# Altium PCB FIT_PM_Dual_Range_AFE.PcbDoc (part 4 of 17)
Units mm, origin at the board's own origin, x right, y up, seen from the top; angles counter-clockwise.
Board outline 259 x 114 mm, 8 copper layers (Top Layer, Mid-Layer 1, Mid-Layer 2, Layer 1, Layer 2, Mid-Layer 3, Mid-Layer 4, Bottom Layer), stack 1.616 mm thick; 963 components, 806 nets, 4757 pads, 2208 vias.
Unrouted connection lines stored in the file: 682.
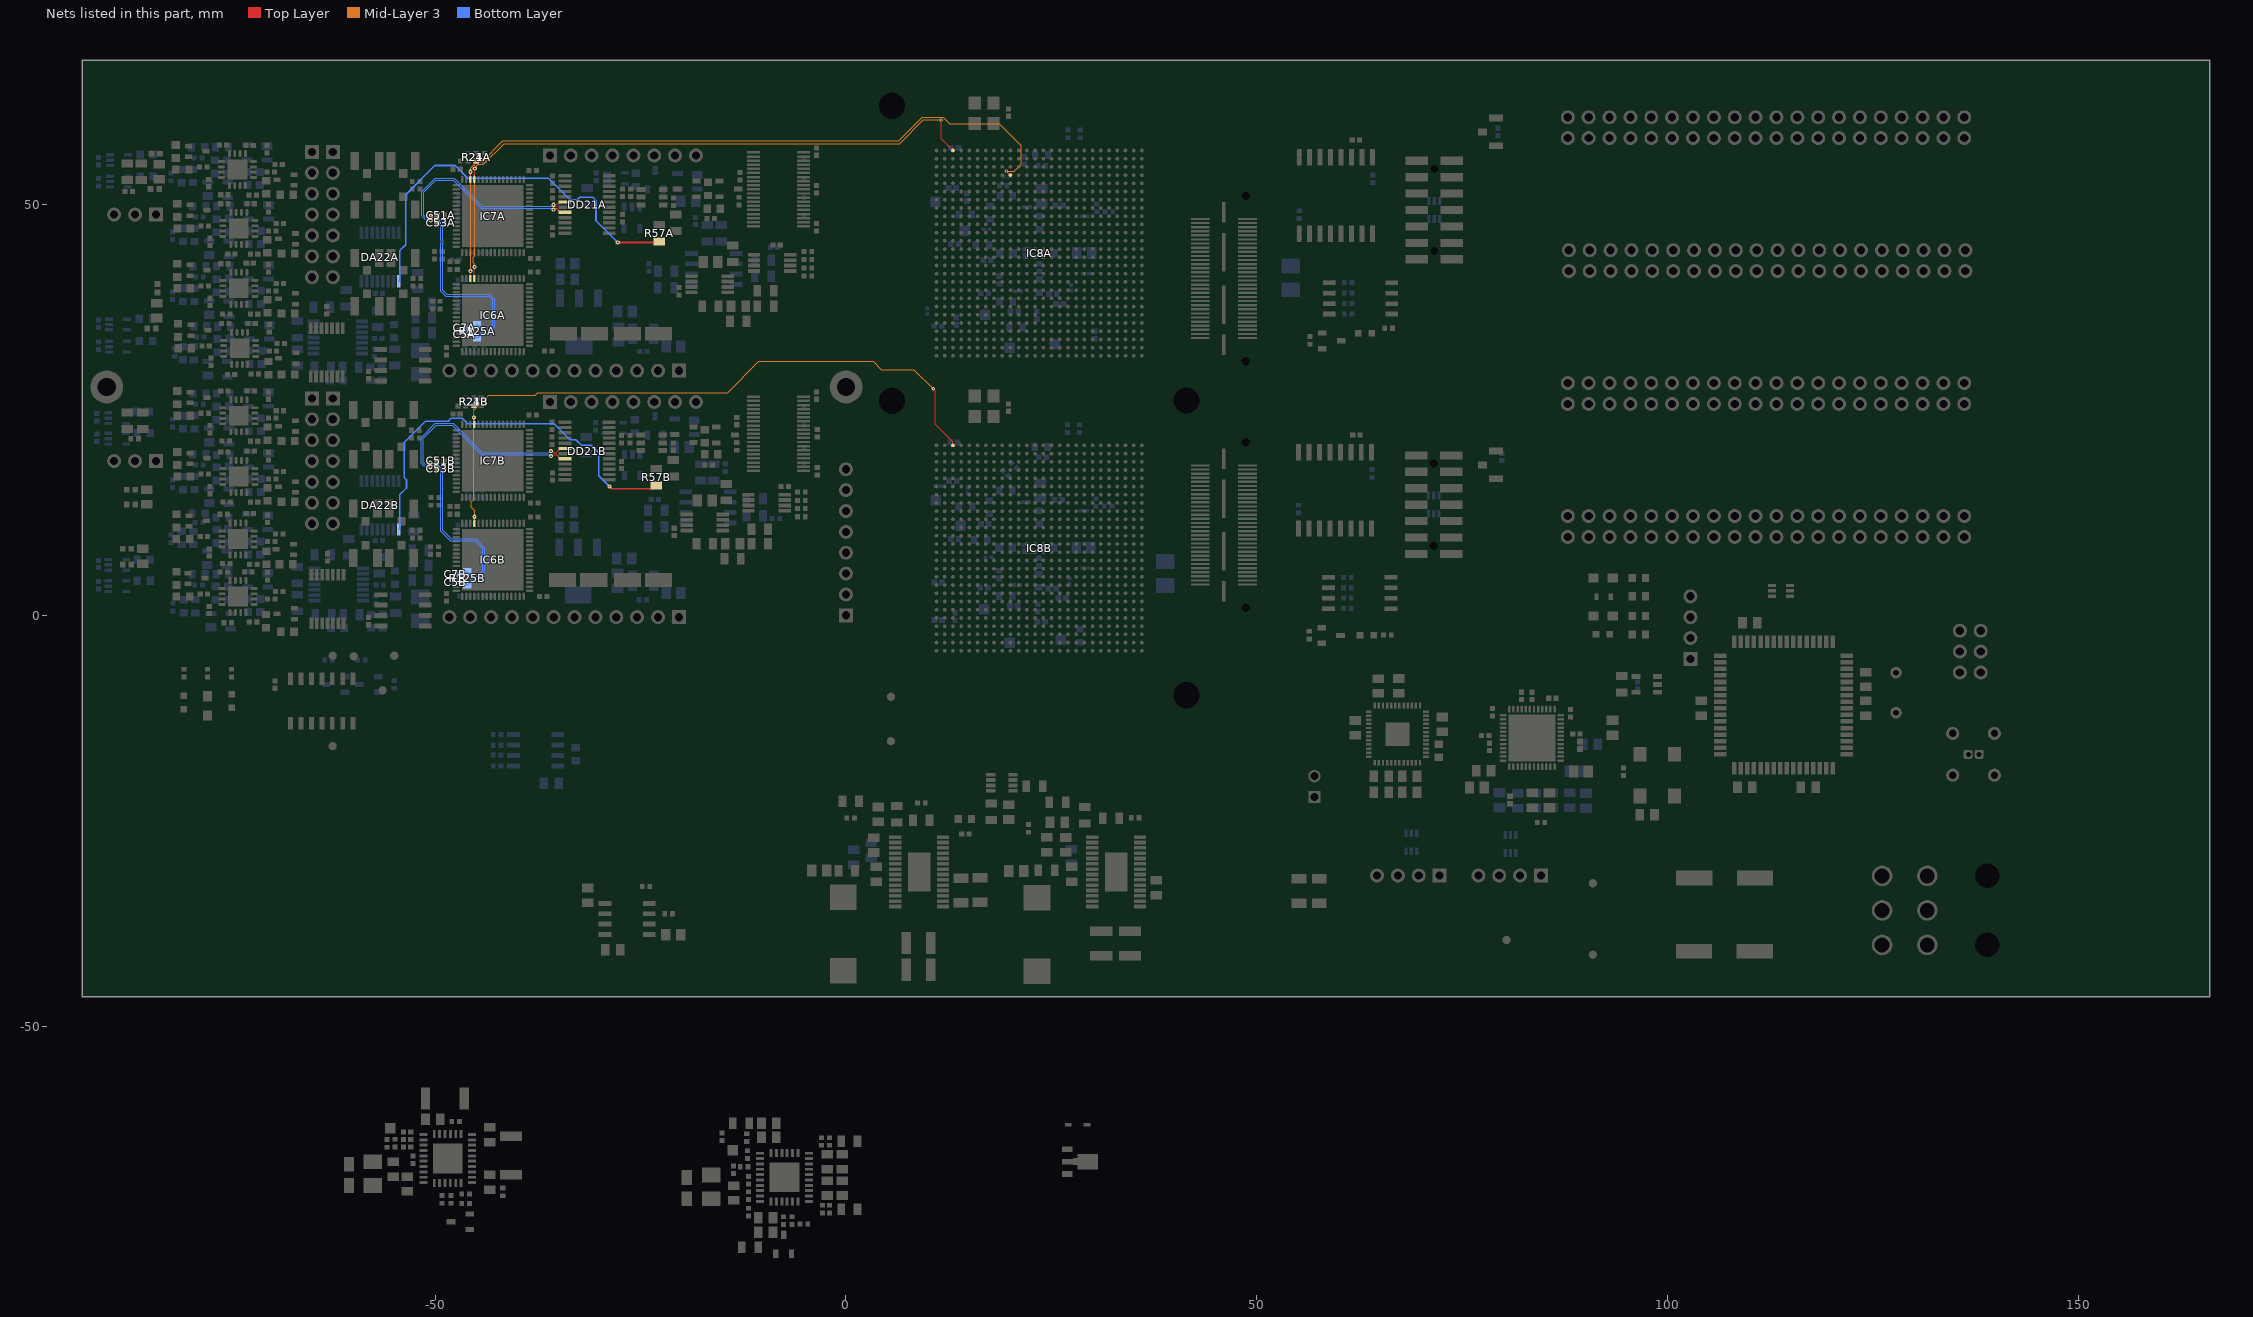
[diagram p8: the nets of this part, all layers, seen from the top]

## Footprints (in the part's own frame and the unit in brackets; to place one, negate y for a bottom-side part, rotate by r counter-clockwise, add the part's x,y. Pads: shape width x height; smd on the part's side, far side on the other; paste and mask are expansions set on the pad) (continued)
SAMTEC_QSH-030-01-L-D-A [mm] "60 (2x30) Contacts, Pitch 0.5mm, Straight Double Row High Speed Ground Plane Socket"
  rect 0.279x2.27 smd mask+0: 1(-7.25,-2.865) 2(-7.25,2.865) 3(-6.75,-2.865) 4(-6.75,2.865) 5(-6.25,-2.865) 6(-6.25,2.865) 7(-5.75,-2.865) 8(-5.75,2.865) 9(-5.25,-2.865) 10(-5.25,2.865) 11(-4.75,-2.865) 12(-4.75,2.865) 13(-4.25,-2.865) 14(-4.25,2.865) 15(-3.75,-2.865) 16(-3.75,2.865) 17(-3.25,-2.865) 18(-3.25,2.865) 19(-2.75,-2.865) 20(-2.75,2.865) 21(-2.25,-2.865) 22(-2.25,2.865) 23(-1.75,-2.865) 24(-1.75,2.865) 25(-1.25,-2.865) 26(-1.25,2.865) 27(-0.75,-2.865) 28(-0.75,2.865) 29(-0.25,-2.865) 30(-0.25,2.865) 31(0.25,-2.865) 32(0.25,2.865) 33(0.75,-2.865) 34(0.75,2.865) 35(1.25,-2.865) 36(1.25,2.865) 37(1.75,-2.865) 38(1.75,2.865) 39(2.25,-2.865) 40(2.25,2.865) 41(2.75,-2.865) 42(2.75,2.865) 43(3.25,-2.865) 44(3.25,2.865) 45(3.75,-2.865) 46(3.75,2.865) 47(4.25,-2.865) 48(4.25,2.865) 49(4.75,-2.865) 50(4.75,2.865) 51(5.25,-2.865) 52(5.25,2.865) 53(5.75,-2.865) 54(5.75,2.865) 55(6.25,-2.865) 56(6.25,2.865) 57(6.75,-2.865) 58(6.75,2.865) 59(7.25,-2.865) 60(7.25,2.865)
  rect 2.54x0.43 smd mask+0: 61(-8.065,0) 64(8.065,0)
  rect 4.7x0.43 smd mask+0: 62(-3.175,0) 63(3.175,0)
  round 0.5 hole 1 unplated mask+0.25: 65(-10.066,2.67) 66(10.066,2.67)
  silkscreen extent -10.67,-4.39 10.64,3.62, body extent -10.67,-3.87 10.64,3.62, height 3.25
SAMTEC_TSW-104-07-L-S-LL [mm] "4 Contacts - Pitch 2.54mm - Single Row  Through Mount Straigh Header (Post Lead 5.84mm, Tail Lead 2.54mm, Insulator 2.54mm)"
  rect 1.7x1.7 hole 1: 1(0,0)
  round 1.7 hole 1: 2(2.54,0) 3(5.08,0) 4(7.62,0)
  silkscreen extent -1.27,-1.27 8.89,1.93, body extent -1.27,-1.27 8.89,1.27, height 8.38
SODFL2512X100N [mm] "SODFL Diode; 1.70mm W X 1.25mm L X 1.00mm H body, IPC Medium Density"
  rect 0.84x0.46 smd: 1(-1.14,0) 2(1.14,0)
  silkscreen extent -1.47,-0.65 0.85,0.85, body extent -1.35,-0.65 1.35,0.65, height 1
SOIC127P600X175-8N [mm] "SOIC 8, Pitch 1.27mm - Body 4x5mm, IPC Medium Density"
  rect 1.55x0.6 smd: 1(-2.7,1.905) 2(-2.7,0.635) 3(-2.7,-0.635) 4(-2.7,-1.905) 5(2.7,-1.905) 6(2.7,-0.635) 7(2.7,0.635) 8(2.7,1.905)
  silkscreen extent -2.52,-2.5 1.55,2.88, body extent -3.1,-2.5 3.1,2.5, height 1.75
SOIC127P600X175-14N [mm] "SOIC 14, Pitch 1.27mm - Body 4x8.75mm, IPC Medium Density"
  rect 1.55x0.6 smd: 1(-2.7,3.81) 2(-2.7,2.54) 3(-2.7,1.27) 4(-2.7,0) 5(-2.7,-1.27) 6(-2.7,-2.54) 7(-2.7,-3.81) 8(2.7,-3.81) 9(2.7,-2.54) 10(2.7,-1.27) 11(2.7,0) 12(2.7,1.27) 13(2.7,2.54) 14(2.7,3.81)
  silkscreen extent -2.52,-4.4 1.55,4.78, body extent -3.1,-4.37 3.1,4.38, height 1.75
SOIC127P1030X265-16N [mm] "SOIC, 1.27mm Pitch; 16 Pin, 7.50mm W X 10.3mm L X 2.65mm H body, IPC Medium Density"
  rect 2x0.6 smd: 1(-4.65,4.445) 2(-4.65,3.175) 3(-4.65,1.905) 4(-4.65,0.635) 5(-4.65,-0.635) 6(-4.65,-1.905) 7(-4.65,-3.175) 8(-4.65,-4.445) 9(4.65,-4.445) 10(4.65,-3.175) 11(4.65,-1.905) 12(4.65,-0.635) 13(4.65,0.635) 14(4.65,1.905) 15(4.65,3.175) 16(4.65,4.445)
  silkscreen extent -5.52,-5.15 3.32,5.38, body extent -5.18,-5.25 5.18,5.25, height 1.68
SOP63P600X175-24N [mm] "SOP, 0.635mm Pitch; 24 Pin, 3.90mm W X 8.65mm L X 1.75mm H Body, IPC Medium Density"
  rect 1.55x0.4 smd: 1(-2.7,3.492) 2(-2.7,2.857) 3(-2.7,2.222) 4(-2.7,1.587) 5(-2.7,0.952) 6(-2.7,0.317) 7(-2.7,-0.318) 8(-2.7,-0.953) 9(-2.7,-1.588) 10(-2.7,-2.223) 11(-2.7,-2.858) 12(-2.7,-3.492) 13(2.7,-3.492) 14(2.7,-2.857) 15(2.7,-2.222) 16(2.7,-1.587) 17(2.7,-0.952) 18(2.7,-0.317) 19(2.7,0.318) 20(2.7,0.953) 21(2.7,1.588) 22(2.7,2.223) 23(2.7,2.858) 24(2.7,3.492)
  silkscreen extent -3.33,-4.35 1.6,4.35, body extent -3.13,-4.37 3.13,4.37, height 1.75
SOP65P490X110-8N [mm] "SOP, 0.65mm pitch; 8 pin, 3.00mm W X 3.00mm L X 1.10mm H body, IPC Medium Density"
  rect 1.5x0.45 smd: 1(-2.2,0.975) 2(-2.2,0.325) 3(-2.2,-0.325) 4(-2.2,-0.975) 5(2.2,-0.975) 6(2.2,-0.325) 7(2.2,0.325) 8(2.2,0.975)
  silkscreen extent -2.83,-1.5 1.12,1.82, body extent -2.45,-1.55 2.45,1.55, height 1.1
SOP65P640X110-16N [mm] "SOP, 0.65mm pitch; 16 pin, 4.40mm W X 5.00mm L X 1.10mm H body IPC Medium Density"
  rect 1.5x0.45 smd: 1(-2.95,2.275) 2(-2.95,1.625) 3(-2.95,0.975) 4(-2.95,0.325) 5(-2.95,-0.325) 6(-2.95,-0.975) 7(-2.95,-1.625) 8(-2.95,-2.275) 9(2.95,-2.275) 10(2.95,-1.625) 11(2.95,-0.975) 12(2.95,-0.325) 13(2.95,0.325) 14(2.95,0.975) 15(2.95,1.625) 16(2.95,2.275)
  silkscreen extent -3.57,-2.5 1.88,3.13, body extent -3.12,-2.55 3.12,2.55, height 1.1
SOP65P640X120-14N [mm] "SOP, 14-Leads, Body 5.1x4.5mm (max), Pitch 0.65mm, IPC Medium Density"
  rect 1.45x0.45 smd: 1(-2.95,1.95) 2(-2.95,1.3) 3(-2.95,0.65) 4(-2.95,0) 5(-2.95,-0.65) 6(-2.95,-1.3) 7(-2.95,-1.95) 8(2.95,-1.95) 9(2.95,-1.3) 10(2.95,-0.65) 11(2.95,0) 12(2.95,0.65) 13(2.95,1.3) 14(2.95,1.95)
  silkscreen extent -3.08,-2.55 1.85,2.85, body extent -3.12,-2.55 3.12,2.55, height 1.2
SOP65P640X120-29N-R274X475 [mm] "SOP, 0.65mm pitch; 28 pin, 4.50mm W X 9.70mm L (thermal tab 4.75 X 2.74mm), IPC Medium Density"
  rect 1.5x0.45 smd: 1(-2.9,4.225) 2(-2.9,3.575) 3(-2.9,2.925) 4(-2.9,2.275) 5(-2.9,1.625) 6(-2.9,0.975) 7(-2.9,0.325) 8(-2.9,-0.325) 9(-2.9,-0.975) 10(-2.9,-1.625) 11(-2.9,-2.275) 12(-2.9,-2.925) 13(-2.9,-3.575) 14(-2.9,-4.225) 15(2.9,-4.225) 16(2.9,-3.575) 17(2.9,-2.925) 18(2.9,-2.275) 19(2.9,-1.625) 20(2.9,-0.975) 21(2.9,-0.325) 22(2.9,0.325) 23(2.9,0.975) 24(2.9,1.625) 25(2.9,2.275) 26(2.9,2.925) 27(2.9,3.575) 28(2.9,4.225)
  rect 2.74x4.75 smd: 29(0,0)
  silkscreen extent -3.53,-4.85 1.8,5.07, body extent -3.22,-4.9 3.22,4.9, height 1.2
SOT65P210X110-3N [mm] "SOT323, 0.65mm pitch; 3 pin, 1.25mm W X 2.00mm L, IPC Medium Density"
  rect 0.85x0.55 smd: 1(-1.05,0.65) 2(-1.05,-0.65) 3(1.05,0)
  silkscreen extent -1.33,-1 0.3,1.57, body extent -1.1,-1.1 1.1,1.1, height 1.1
SOT65P210X110-5N [mm] "SOT353, SC70-5, SOT, 0.65mm Pitch, 5 Pin, 1.25mm W X 2.00mm L X 1.10mm H, IPC Medium Density"
  rect 0.95x0.4 smd: 1(-1.1,0.65) 2(-1.1,0) 3(-1.1,-0.65) 4(1.1,-0.65) 5(1.1,0.65)
  silkscreen extent -1.42,-1 0.3,1.47, body extent -1.2,-1.1 1.2,1.1, height 1.1
SOT65P210X110-6N [mm] "SOT363, SC70-6, SOT, 0.65mm Pitch, 6 Pin, 1.25mm W X 2.00mm L X 1.10mm H, IPC Medium Density"
  rect 0.95x0.4 smd: 1(-1.1,0.65) 2(-1.1,0) 3(-1.1,-0.65) 4(1.1,-0.65) 5(1.1,0) 6(1.1,0.65)
  silkscreen extent -1.42,-1 0.3,1.48, body extent -1.2,-1.1 1.2,1.1, height 1.1
SOT65P280X100-8N [mm] "SOT, 0.65mm pitch; 8 pin, 1.625mm W X 2.90mm L X 1.00mm H body, IPC Medium Density"
  rect 1.1x0.45 smd: 1(-1.35,0.975) 2(-1.35,0.325) 3(-1.35,-0.325) 4(-1.35,-0.975) 5(1.35,-0.975) 6(1.35,-0.325) 7(1.35,0.325) 8(1.35,0.975)
  silkscreen extent -1.77,-1.45 0.48,1.82, body extent -1.4,-1.5 1.4,1.5, height 1
SOT89 [mm] "SOT89-3, 3-Leads, Body 2.48x4.5mm"
  rect 1.25x0.7 smd: 1(-1.89,1.5) 3(-1.89,-1.5)
  rect 1.35x0.7 smd: 2(-1.84,0)
  rect 3x0.85 smd: 2(0.33,0)
  rect 2.475x0.525 smd: 2(0.592,-0.687) 2(0.592,0.687)
  Top Layer region: -1.165,0.425 -0.64,0.95 -0.64,-0.95 -1.165,-0.425
  silkscreen extent -2.22,-2.25 1.24,2.58, body extent -2.44,-2.25 1.81,2.25, height 1.6
SOT95P230X110-3N [mm] "SOT23, 3 pin, Pitch 0.95mm - 1.3mm W X 2.9mm L X 1.1mm H, IPC Medium Density"
  rect 1x0.6 smd: 1(-1.15,0.95) 2(-1.15,-0.95) 3(1.15,0)
  silkscreen extent -1.53,-1.45 0.33,1.87, body extent -1.08,-1.5 1.25,1.5, height 1.1
SOT95P240X110-3N [mm] "SOT23 3-Leads, Pitch 0.95mm, Body 1.3x2.9mm, IPC Medium Density"
  rect 1.05x0.65 smd: 1(-1.15,0.95) 2(-1.15,-0.95) 3(1.15,0)
  silkscreen extent -1.52,-1.45 0.3,1.92, body extent -1.25,-1.5 1.25,1.5, height 1.1
SOT95P240X130-3N [mm] "SOT23 3-Leads, Pitch 0.95mm - Body 1.3x2.9mm, IPC Medium Density"
  rect 1.05x0.65 smd: 1(-1.15,0.95) 2(-1.15,-0.95) 3(1.15,0)
  silkscreen extent -1.53,-1.45 0.3,1.92, body extent -1.25,-1.5 1.25,1.5, height 1.3
SOT95P280X145-5N [mm] "SOT, 0.95mm pitch; 5 pin, 1.60mm W X 2.90mm L X 1.45mm H body, IPC Medium Density"
  rect 1.1x0.6 smd: 1(-1.3,0.95) 2(-1.3,0) 3(-1.3,-0.95) 4(1.3,-0.95) 5(1.3,0.95)
  silkscreen extent -0.43,-1.45 0.43,1.45, body extent -1.4,-1.5 1.4,1.5, height 1.45
SOT95P280X145-6N [mm] "SOT23, 6-Leads, Body 1.6x3.0mm, Pitch 0.95mm, IPC Medium Density"
  rect 1.05x0.6 smd: 1(-1.35,0.95) 2(-1.35,0) 3(-1.35,-0.95) 4(1.35,-0.95) 5(1.35,0) 6(1.35,0.95)
  silkscreen extent -1.78,-1.55 0.45,1.92, body extent -1.4,-1.5 1.4,1.5, height 1.45
SOT95P285X140-5N [mm] "SOT23, 5-Leads, Body 3.00x2.85mm, Pitch 0.95mm, IPC Medium Density"
  rect 1.1x0.6 smd: 1(-1.3,0.95) 2(-1.3,0) 3(-1.3,-0.95) 4(1.3,-0.95) 5(1.3,0.95)
  silkscreen extent -0.43,-1.5 0.42,1.5, body extent -1.43,-1.5 1.43,1.5, height 1.4
SOT143N [mm] "SOT143, 4-Leads, Body 3.0x2.6mm (max), Pitch 1.92mm, IPC Medium Density"
  rect 1.3x1 smd: 1(-1.2,0.75)
  rect 1.3x0.6 smd: 2(-1.2,-0.95) 3(1.2,-0.95) 4(1.2,0.95)
  silkscreen extent -1.18,-1.5 0.7,1.93, body extent -1.25,-1.5 1.25,1.5, height 1.1
SOT230P700X180-4N [mm] "SOT223, 2.30mm pitch; 3 pin, 3.70mm W X 6.70mm L, IPC Medium Density"
  rect 2.15x0.95 smd: 1(-2.9,2.3) 2(-2.9,0) 3(-2.9,-2.3)
  rect 2.15x3.25 smd: 4(2.9,0)
  silkscreen extent -3.87,-3.35 1.45,3.47, body extent -3.65,-3.35 3.65,3.35, height 1.81
SW_TYCO_1571983-4 [mm] "Pitch 1.27mm,  Body 6.2x6.2mm, 4 Ways SPST Surface-Mount DIP Switch, TYCO GDH Serie"
  rect 1.55x0.55 smd: 1(-3.8,1.905) 2(-3.8,0.635) 3(-3.8,-0.635) 4(-3.8,-1.905) 5(3.8,-1.905) 6(3.8,-0.635) 7(3.8,0.635) 8(3.8,1.905)
  silkscreen extent -4.43,-3.1 2.7,3.1, body extent -4.06,-3.1 4.06,3.1, height 2.36
TPS127 [mm] "1.27 x  1.27mm SMD Test Point Area"
  rect 1.27x1.27 smd paste-1.27: 1(0,0)
  silkscreen extent -0.94,-0.94 0.94,0.94
XTAL_ABRACON_ABL [mm] "HC-49/U-S Leaded Cristal, Body 11.5x4.66mm; Pitch 4.88mm"
  round 1.4 hole 0.7: 1(-2.44,0) 2(2.44,0)
  silkscreen extent -5.75,-2.5 5.75,2.5, body extent -5.75,-2.5 5.75,2.5, height 3.5

## Part data
B2 B3 B4 B6 B11 B12 B17 B18 B19 B20: library part SMD_PAD_D1MM, "Pad", Author="CERN DEM JLC", Component Type="Standard (No BOM)", ComponentHeight=0mm, CreateDate=10.10.2017, Family="SMD Pad", HelpURL=Undefined, LatestRevisionDate=10.10.2017, Mounted=No, PackageDescription="1mm Diameter SMD Pad", Part Description="1mm Diameter SMD Pad", Part Number=SMD_PAD_D1MM, Pin Count=1, Sense=No, SMD=Yes, Socket=No, Status=None
C1A C1B: library part CC0805_2.7PF_250V_0.05PF_NP0, "Non-polarised capacitor", Case=0805, Manufacturer=GENERIC, Manufacturer1 ComponentHeight=1.30mm, Manufacturer1 Example=AVX, Manufacturer1 Part Number=600F2R7AT250XT, Tolerance=±0.05pF, Voltage=50V, Author="CERN DEM HF", Component Type=Standard, CreateDate=07.05.2024, HelpURL=\\cern.ch\dfs\Applications\Altium\Datasheets\CC0805_NP0_AVX(MLC).pdf, LatestRevisionDate=07.05.2024, Manufacturer Part Number=CC0805_2.7PF_250V_0.05PF_NP0, Mounted=Yes, Part Description="SMD Multilayer Chip Ceramic Capacitor", Part Number=CC0805_2.7PF_250V_0.05PF_NP0, Pin Count=2, Sense=No, SMD=Yes, Socket=No, Status=None, TC=C0G/NP0
C2: library part CAE830-1020_150UF_25V_20%, "Polarised capacitor", Case=F, Manufacturer=PANASONIC, Manufacturer Part Number=EEEFP1E151AP, Tolerance=±20%, Voltage=25V, Author="CERN DEM HF", Component Type=Standard, ComponentHeight=10.2mm, CreateDate=24.05.2024, HelpURL=\\cern.ch\dfs\Applications\Altium\Datasheets\CAE_PANASONIC_FP.pdf, LatestRevisionDate=24.05.2024, Mounted=Yes, Part Description="Aluminum Electrolytic SMT Capacitor", Part Number=CAE830-1020_150UF_25V_20%, Pin Count=2, Sense=No, SMD=Yes, Socket=No, Status="Not Recommended"
C3A C3B C5A C5B C7A C7B C8A C8B C9A C9B C10A C10B C16A C16B C17A C17B C18A C18B C50A C50B C51A C51B C53A C53B C55A C55B C56A C56B C58A C58B C59A C59B C60A C60B C61A C61B C78A C78B C234A C234B: library part CC0402_100NF_16V_10%_X5R, "Non-polarised capacitor", Case=0402, Manufacturer=GENERIC, Manufacturer1 ComponentHeight=0.55mm, Manufacturer1 Example=MURATA, Manufacturer1 Part Number=GRM155R61C104KA88D, Tolerance=±10%, Voltage=16V, Author="CERN DEM JLC", Component Type=Standard, CreateDate=10.12.2013, HelpURL=\\cern.ch\dfs\Applications\Altium\Datasheets\CC0402_X5R_MURATA_GRM.pdf, LatestRevisionDate=10.12.2013, Manufacturer Part Number=CC0402_100NF_16V_10%_X5R, Mounted=Yes, Part Description="SMD Multilayer Chip Ceramic Capacitor", Part Number=CC0402_100NF_16V_10%_X5R, Pin Count=2, Sense=No, SMD=Yes, Socket=No, Status=None, TC=X5R
C4 C118 C135 C137: library part CC1206_22UF_25V_20%_X5R, "Non-polarised capacitor", Case=1206, Manufacturer=GENERIC, Manufacturer1 ComponentHeight=1.8mm, Manufacturer1 Example=TDK, Manufacturer1 Part Number=C3216X5R1E226M160, Tolerance=±20%, Voltage=25V, Author="CERN DEM WB", Component Type=Standard, CreateDate=25.07.2018, HelpURL=\\cern.ch\dfs\Applications\Altium\Datasheets\CC1206_X5R_TDK_C.pdf, LatestRevisionDate=25.07.2018, Manufacturer Part Number=CC1206_22UF_25V_20%_X5R, Mounted=Yes, Part Description="SMD Multilayer Chip Ceramic Capacitor", Part Number=CC1206_22UF_25V_20%_X5R, Pin Count=2, Sense=No, SMD=Yes, Socket=No, Status=None, TC=X5R
C6 C11 C15A C15B C36A C36B C37A C37B C38A C38B C39A C39B C40 C41 C42 C82A C82B C94A C94B C95A C95B C96A C96B C97A C97B C99A C99B C100A C100B C101A C101B C104A C104B C105 C106 C107 C108 C109 C110A C110B C111A C111B C112A C112B C113A C113B C116A C116B C117A C117B: library part CC0402_220NF_16V_10%_X7R, "Non-polarised capacitor", Case=0402, Manufacturer=GENERIC, Manufacturer1 ComponentHeight=0.55mm, Manufacturer1 Example=TDK, Manufacturer1 Part Number=C1005X7R1C224K050, Tolerance=±10%, Voltage=16V, Author="CERN DEM JLC", Component Type=Standard, CreateDate=25.10.2012, HelpURL=\\cern.ch\dfs\Applications\Altium\Datasheets\CC0402_X7R_TDK_C.pdf, LatestRevisionDate=25.10.2012, Manufacturer Part Number=CC0402_220NF_16V_10%_X7R, Mounted=Yes, Part Description="SMD Multilayer Chip Ceramic Capacitor", Part Number=CC0402_220NF_16V_10%_X7R, Pin Count=2, Sense=No, SMD=Yes, Socket=No, Status=Preferred, TC=X7R
C12: library part CC0805_2.2NF_50V_5%_C0G, "Non-polarised capacitor", Case=0805, Manufacturer=GENERIC, Manufacturer1 ComponentHeight=0.88mm, Manufacturer1 Example=KEMET, Manufacturer1 Part Number=C0805C222J5GACTU, Tolerance=±5%, Voltage=50V, Author="CERN DEM MR", Component Type=Standard, CreateDate=26.01.2016, HelpURL="\\cern.ch\dfs\Applications\Altium\Datasheets\CC0805_C0G_KEMET_(Commercial Grade).pdf", LatestRevisionDate=26.01.2016, Manufacturer Part Number=CC0805_2.2NF_50V_5%_C0G, Mounted=Yes, Part Description="SMD Multilayer Chip Ceramic Capacitor", Part Number=CC0805_2.2NF_50V_5%_C0G, Pin Count=2, Sense=No, SMD=Yes, Socket=No, Status=None, TC=C0G/NP0
C13 C45: library part CTE3528-21_33UF_16V_10%, "Polarised capacitor", Case=B, Manufacturer=GENERIC, Manufacturer1 ComponentHeight=2.1mm, Manufacturer1 Example=AVX, Manufacturer1 Part Number=TAJB336K016R, Tolerance=±10%, Voltage=16V, Author="CERN DEM JLC", Component Type=Standard, CreateDate=03.12.2007, HelpURL=\\cern.ch\dfs\Applications\Altium\Datasheets\CTE_AVX_TAJ.pdf, LatestRevisionDate=03.12.2007, Manufacturer Part Number=CTE3528-21_33UF_16V_10%, Mounted=Yes, Part Description="Solid Tantalum Chip Capacitor", Part Number=CTE3528-21_33UF_16V_10%, Pin Count=2, Sense=No, SMD=Yes, Socket=No, Status=Preferred
C14 C47: library part CTE3216-18_10UF_16V_20%_AVX_TCJ, "Polarised capacitor", Case=A, Manufacturer=AVX, Manufacturer Part Number=TCJA106M016R0200, Tolerance=±20%, Voltage=16V, Author="CERN DEM JLC", Component Type=Standard, ComponentHeight=1.8mm, CreateDate=29.03.2012, HelpURL=\\cern.ch\dfs\Applications\Altium\Datasheets\CTE_AVX_TCJ.pdf, LatestRevisionDate=29.03.2012, Mounted=Yes, Part Description="ESR 0R200 Tantalum Solid Electrolytic Chip Capacitor with Conductive Polymer Electrode", Part Number=CTE3216-18_10UF_16V_20%_AVX_TCJ, Pin Count=2, Sense=No, SMD=Yes, Socket=No, Status=Preferred
C19 C21 C22 C23 C29 C48 C68 C69 C70 C71 C72 C73 C75 C76: library part CC0805_22UF_16V_10%_X5R, "Non-polarised capacitor", Case=0805, Manufacturer=GENERIC, Manufacturer1 ComponentHeight=1.35mm, Manufacturer1 Example=TDK, Manufacturer1 Part Number=C2012X5R1C226KT, Tolerance=±10%, Voltage=16V, Author="CERN DEM JLC", Component Type=Standard, CreateDate=25.10.2012, HelpURL=\\cern.ch\dfs\Applications\Altium\Datasheets\CC0805_X5R_TDK_C.pdf, LatestRevisionDate=25.10.2012, Manufacturer Part Number=CC0805_22UF_16V_10%_X5R, Mounted=Yes, Part Description="SMD Multilayer Chip Ceramic Capacitor", Part Number=CC0805_22UF_16V_10%_X5R, Pin Count=2, Sense=No, SMD=Yes, Socket=No, Status=Preferred, TC=X5R
C20 C49: library part CC0402_100NF_16V_10%_X7R, "Non-polarised capacitor", Case=0402, Manufacturer=GENERIC, Manufacturer1 ComponentHeight=0.55mm, Manufacturer1 Example=MURATA, Manufacturer1 Part Number=GRM155R71C104KA88D, Tolerance=±10%, Voltage=16V, Author="CERN DEM JLC", Component Type=Standard, CreateDate=05/12/2013, HelpURL=\\cern.ch\dfs\Applications\Altium\Datasheets\CC0402_X7R_MURATA_GRM.pdf, LatestRevisionDate=03/12/2007, Manufacturer Part Number=CC0402_100NF_16V_10%_X7R, Mounted=Yes, Part Description="SMD Multilayer Chip Ceramic Capacitor", Part Number=CC0402_100NF_16V_10%_X7R, Pin Count=2, Sense=No, SMD=Yes, Socket=No, Status="Not Recommended", TC=X7R
C24 C62A C62B C67A C67B: library part CC0805_1UF_25V_10%_X7R, "Non-polarised capacitor", Case=0805, Manufacturer=GENERIC, Manufacturer1 ComponentHeight=1.4mm, Manufacturer1 Example=KEMET, Manufacturer1 Part Number=C0805C105K3RAC, Tolerance=±10%, Voltage=25V, Author="CERN DEM JLC", Component Type=Standard, CreateDate=23.03.2009, HelpURL=\\cern.ch\dfs\Applications\Altium\Datasheets\CC0805_X7R_KEMET.pdf, LatestRevisionDate=23.03.2009, Manufacturer Part Number=CC0805_1UF_25V_10%_X7R, Mounted=Yes, Part Description="SMD Multilayer Chip Ceramic Capacitor", Part Number=CC0805_1UF_25V_10%_X7R, Pin Count=2, Sense=No, SMD=Yes, Socket=No, Status=Preferred, TC=X7R
C25 C26 C85A C85B C147A C147B C152A C152B C157A C157B C165A C165B C166A C166B C167A C167B C198A C198B C211A C211B C216A C216B C225A C225B C228A C228B C231A C231B: library part CC0402_10UF_6.3V_20%_X5R, "Non-polarised capacitor", Case=0402, Manufacturer=GENERIC, Manufacturer1 ComponentHeight=0.70mm, Manufacturer1 Example=TDK, Manufacturer1 Part Number=C1005X5R0J106M050BC, Tolerance=±10%, Voltage=6.3V, Author="CERN DEM JLC", Component Type=Standard, CreateDate=07.01.2015, HelpURL=\\cern.ch\dfs\Applications\Altium\Datasheets\CC0402_X5R_TDK_C.pdf, LatestRevisionDate=07.01.2015, Manufacturer Part Number=CC0402_10UF_6.3V_20%_X5R, Mounted=Yes, Part Description="SMD Multilayer Chip Ceramic Capacitor", Part Number=CC0402_10UF_6.3V_20%_X5R, Pin Count=2, Sense=No, SMD=Yes, Socket=No, Status=Preferred, TC=X5R
C27: library part CC0805_2.2UF_50V_10%_X7R, "Non-polarised capacitor", Case=0805, Manufacturer=GENERIC, Manufacturer1 ComponentHeight=1.40mm, Manufacturer1 Example=MURATA, Manufacturer1 Part Number=GRM21BR61H225KA73L, Tolerance=±10%, Voltage=50V, Author="CERN DEM JLC", Component Type=Standard, CreateDate=18.08.2014, HelpURL=\\cern.ch\dfs\Applications\Altium\Datasheets\CC0805_X7R_MURATA_GRM.pdf, LatestRevisionDate=18.08.2014, Manufacturer Part Number=CC0805_2.2UF_50V_10%_X7R, Mounted=Yes, Part Description="SMD Multilayer Chip Ceramic Capacitor", Part Number=CC0805_2.2UF_50V_10%_X7R, Pin Count=2, Sense=No, SMD=Yes, Socket=No, Status=Preferred, TC=X7R
C28 C30 C31 C32 C33 C34 C35 C43 C122 C123 C132 C134 C136 C143 C144A C144B C149 C151 C194 C195 C199 C201 C212 C213 C217 C218 C219 C220 C223 C224 C255 C256 C257 C258 C259: library part CC0805_220NF_50V_10%_X7R, "Non-polarised capacitor", Case=0805, Manufacturer=GENERIC, Manufacturer1 ComponentHeight=1.35mm, Manufacturer1 Example=MURATA, Manufacturer1 Part Number=GRM21BR71H224KA01L, Tolerance=±10%, Voltage=50V, Author="CERN DEM JLC", Component Type=Standard, CreateDate=03.12.2007, HelpURL=\\cern.ch\dfs\Applications\Altium\Datasheets\CC0805_X7R_MURATA.pdf, LatestRevisionDate=03.12.2007, Manufacturer Part Number=CC0805_220NF_50V_10%_X7R, Mounted=Yes, Part Description="SMD Multilayer Chip Ceramic Capacitor", Part Number=CC0805_220NF_50V_10%_X7R, Pin Count=2, Sense=No, SMD=Yes, Socket=No, Status=Preferred, TC=X7R
C44 C77: library part CC0402_1UF_16V_10%_X5R, "Non-polarised capacitor", Case=0402, Manufacturer=GENERIC, Manufacturer1 ComponentHeight=0.55mm, Manufacturer1 Example=TDK, Manufacturer1 Part Number=C1005X5R1C105KT, Tolerance=±10%, Voltage=16V, Author="CERN DEM JLC", Component Type=Standard, CreateDate=25.10.2012, HelpURL=\\cern.ch\dfs\Applications\Altium\Datasheets\CC0402_X5R_TDK_C.pdf, LatestRevisionDate=25.10.2012, Manufacturer Part Number=CC0402_1UF_16V_10%_X5R, Mounted=Yes, Part Description="SMD Multilayer Chip Ceramic Capacitor", Part Number=CC0402_1UF_16V_10%_X5R, Pin Count=2, Sense=No, SMD=Yes, Socket=No, Status=Preferred, TC=X5R
C46A C46B C46C C46D C52A C52B C52C C52D C57A C57B C57C C57D C66A C66B C66C C66D: library part CC0402_20PF_50V_1%_C0G, "Non-polarised capacitor", Case=0402, Manufacturer=MURATA, Manufacturer Part Number=GJM1555C1H200FB01, Tolerance=±1%, Voltage=50V, Author=GK, Component Type=Standard, ComponentHeight=0.55mm, CreateDate=14.07.2020, HelpURL=\\cern.ch\dfs\Applications\Altium\Datasheets\CC0402_MURATA_GJM1555C1H220FB01.pdf, LatestRevisionDate=14.07.2020, Mounted=Yes, Part Description="SMD Multilayer Chip Ceramic Capacitor", Part Number=CC0402_20PF_50V_1%_C0G, Pin Count=2, Sense=No, SMD=Yes, Socket=No, Status=None, TC=C0G/NP0
C54A C54B C63A C63B C63C C63D C64A C64B C64C C64D C74A C74B C74C C74D C90A C90B C102A C102B C102C C102D C125A C125B C125C C125D C126A C126B C126C C126D C129A C129B C129C C129D C131A C131B C138A C138B C138C C138D C140A C140B C140C C140D C294A C294B C294C C294D C313A C313B: library part CC0402_220NF_35V_10%_X7R, "Non-polarised capacitor", Case=0402, Manufacturer=GENERIC, Manufacturer1 ComponentHeight=0.55mm, Manufacturer1 Example=TDK, Manufacturer1 Part Number=CGA2B1X7R1V224K050, Tolerance=±10%, Voltage=35V, Author="CERN DEM HF", Component Type=Standard, CreateDate=09.11.2023, HelpURL=\\cern.ch\dfs\Applications\Altium\Datasheets\CC0402_X7R_TDK_CGA.pdf, LatestRevisionDate=09.11.2023, Manufacturer Part Number=CC0402_220NF_35V_10%_X7R, Mounted=Yes, Part Description="SMD Multilayer Chip Ceramic Capacitor", Part Number=CC0402_220NF_35V_10%_X7R, Pin Count=2, Sense=No, SMD=Yes, Socket=No, Status=None, TC=X7R
C65A C65B C87A C87B: library part CAE530-610_47UF_16V_20%, "Polarised capacitor", Case=C, Manufacturer=CHEMI-CON, Manufacturer Part Number=HHXD160ARA470ME61G, Tolerance=±20%, Voltage=16V, Author="CERN DEM HF", Component Type=Standard, ComponentHeight=6.1mm, CreateDate=15.04.2024, HelpURL=\\cern.ch\dfs\Applications\Altium\Datasheets\CAE_CHIMI-CON_HXD.pdf, LatestRevisionDate=15.04.2024, Mounted=Yes, Part Description="Conductive Polymer Hybrid Aluminum Electrolytic Capacitor", Part Number=CAE530-610_47UF_16V_20%, Pin Count=2, Sense=No, SMD=Yes, Socket=No, Status="Not Recommended"
C79A C79B: library part CC0805_47pF_50V_2%_X8R, "Non-polarised capacitor", Case=0805, Manufacturer=KEMET, Manufacturer Part Number=C0805C470G5HACAUTO, Tolerance=±2%, Voltage=50V, Author="CERN DEM HF", Component Type=Standard, ComponentHeight=1.4mm, CreateDate=07.05.2024, HelpURL=\\cern.ch\dfs\Applications\Altium\Datasheets\CC0805_X8R_KEMET.pdf, LatestRevisionDate=07.05.2024, Mounted=Yes, Part Description="SMD Multilayer Chip Ceramic Capacitor (Automotive Grade)", Part Number=CC0805_47pF_50V_2%_X8R, Pin Count=2, Sense=No, SMD=Yes, Socket=No, Status="Not Recommended", TC=X8R
C80A C80B C81A C81B C164A C164B C197A C197B C208A C208B C215A C215B C222A C222B C227A C227B C230A C230B: library part CC0603_47UF_6.3V_20%_X5R, "Non-polarised capacitor", Case=0603, Manufacturer=GENERIC, Manufacturer1 ComponentHeight=1mm, Manufacturer1 Example=MURATA, Manufacturer1 Part Number=GRM188R60J476ME15D, Tolerance=±20%, Voltage=6.3V, Author="CERN DEM JLC", Component Type=Standard, HelpURL=\\cern.ch\dfs\Applications\Altium\Datasheets\CC0603_MURATA_GRM188R60J476ME15D.pdf, Manufacturer Part Number=CC0603_47UF_6.3V_20%_X5R, Mounted=Yes, Part Description="SMD Multilayer Chip Ceramic Capacitor", Part Number=CC0603_47UF_6.3V_20%_X5R, Pin Count=2, Sense=No, SMD=Yes, Socket=No, Status=None, TC=X5R
  C80A C80B C81A C81B C164A C164B: CreateDate=01.02.2018, LatestRevisionDate=01.02.2018
  C197A C197B C208A C208B C215A C215B C222A C222B C227A C227B C230A C230B: CreateDate=2018-02-01, LatestRevisionDate=2018-02-01
C83A C83B C84A C84B: library part CC0805_100UF_4V_20%_X6S_MURATA_GRM21BC80G107ME15, "Non-polarised capacitor", Case=0805, Manufacturer=MURATA, Manufacturer Part Number=GRM21BC80G107ME15, Tolerance=±20%, Voltage=4V, Author="CERN DEM BC", Component Type=Standard, ComponentHeight=1.45mm, CreateDate=2020-09-02, HelpURL=\\cern.ch\dfs\Applications\Altium\Datasheets\CC0805_MURATA_GRM21BC80G107ME15.pdf, LatestRevisionDate=2020-09-02, Mounted=Yes, Part Description="Chip Multilayer Ceramic Capacitor for General Purpose", Part Number=CC0805_100UF_4V_20%_X6S_MURATA_GRM21BC80G107ME15, Pin Count=2, Sense=No, SMD=Yes, Socket=No, Status=None, TC=X6S
C86 C88: library part CC0805_20PF_50V_2%_C0G, "Non-polarised capacitor", Case=0805, Manufacturer=GENERIC, Manufacturer1 ComponentHeight=1.45mm, Manufacturer1 Example="YAGEO PHYCOMP", Manufacturer1 Part Number=CC0805GRNPO9BN200, Tolerance=±2%, Voltage=50V, Author="CERN DEM HF", Component Type=Standard, CreateDate=07.05.2024, HelpURL=\\cern.ch\dfs\Applications\Altium\Datasheets\CC0805_NP0_YAGEO.pdf, LatestRevisionDate=07.05.2024, Manufacturer Part Number=CC0805_20PF_50V_2%_C0G, Mounted=Yes, Part Description="SMD Multilayer Chip Ceramic Capacitor", Part Number=CC0805_20PF_50V_2%_C0G, Pin Count=2, Sense=No, SMD=Yes, Socket=No, Status=None, TC=C0G/NP0
C89A C89B C89C C89D C91A C91B C91C C91D C92A C92B C92C C92D C93A C93B C93C C93D C286A C286B C286C C286D C287A C287B C287C C287D C288A C288B C288C C288D C291A C291B C291C C291D C318A C318B: library part CC0402_10NF_16V_10%_X7R, "Non-polarised capacitor", Case=0402, Manufacturer=GENERIC, Manufacturer1 ComponentHeight=0.55mm, Manufacturer1 Example=PHYCOMP, Manufacturer1 Part Number=223878715636, Tolerance=±10%, Voltage=16V, Author="CERN DEM JLC", Component Type=Standard, CreateDate=03.12.2007, HelpURL=\\cern.ch\dfs\Applications\Altium\Datasheets\CC0402_X7R_PHYCOMP.pdf, LatestRevisionDate=03.12.2007, Manufacturer Part Number=CC0402_10NF_16V_10%_X7R, Mounted=Yes, Part Description="SMD Multilayer Chip Ceramic Capacitor", Part Number=CC0402_10NF_16V_10%_X7R, Pin Count=2, Sense=No, SMD=Yes, Socket=No, Status="Not Recommended", TC=X7R
C98A C98B C158A C158B C159A C159B C160A C160B C161A C161B C162A C162B C193A C193B C196A C196B C233A C233B: library part CC0201_470NF_4V_20%_X5R, "Non-polarised capacitor", Case=0201, Manufacturer=GENERIC, Manufacturer1 ComponentHeight=0.33mm, Manufacturer1 Example="TAIYO YUDEN", Manufacturer1 Part Number=AMK063BJ474MP-F, Tolerance=±20%, Voltage=4V, Author="CERN DEM JLC", Component Type=Standard, CreateDate=27.05.2010, HelpURL=\\cern.ch\dfs\Applications\Altium\Datasheets\CC0201_X5R_TAIYO-YUDEN_STANDARD-CLASS2.pdf, LatestRevisionDate=27.05.2010, Manufacturer Part Number=CC0201_470NF_4V_20%_X5R, Mounted=Yes, Part Description="SMD Multilayer Chip Ceramic Capacitor", Part Number=CC0201_470NF_4V_20%_X5R, Pin Count=2, Sense=No, SMD=Yes, Socket=No, Status="Not Recommended", TC=X5R
C103A C103B: library part CTE3528-12_47UF_10V_20%_PANASONIC_TPB, "Polarised capacitor", Case=T, Manufacturer=PANASONIC, Manufacturer Part Number=10TPB47M, Tolerance=±20%, Voltage=10V, Author=GK, Component Type=Standard, ComponentHeight=1.2mm, CreateDate=01.09.2014, HelpURL=\\cern.ch\dfs\Applications\Altium\Datasheets\CTE_PANASONIC_TPG.pdf, LatestRevisionDate=01.09.2014, Mounted=Yes, Part Description="ESR 0R07 Solid Tantalum Chip Capacitor", Part Number=CTE3528-12_47UF_10V_20%_PANASONIC_TPB, Pin Count=2, Sense=No, SMD=Yes, Socket=No, Status=None
C114 C115 C145 C146: library part CC1210_47UF_16V_20%_X5R, "Non-polarised capacitor", Case=1210, Manufacturer=GENERIC, Manufacturer1 ComponentHeight=2.7mm, Manufacturer1 Example="TAIYO YUDEN", Manufacturer1 Part Number=EMK325BJ476MM-T, Tolerance=±20%, Voltage=16V, Author="CERN DEM MR", Component Type=Standard, CreateDate=03.02.2016, HelpURL=\\cern.ch\dfs\Applications\Altium\Datasheets\CC1210_X5R_TAIYO-YUDEN_HIGH-VALUE.pdf, LatestRevisionDate=03.02.2016, Manufacturer Part Number=CC1210_47UF_16V_20%_X5R, Mounted=Yes, Part Description="SMD Multilayer Chip Ceramic Capacitor", Part Number=CC1210_47UF_16V_20%_X5R, Pin Count=2, Sense=No, SMD=Yes, Socket=No, Status=None, TC=X5R
C124 C142: library part CC0805_360PF_50V_5%_C0G, "Non-polarised capacitor", Case=0805, Manufacturer=GENERIC, Manufacturer1 ComponentHeight=1.45mm, Manufacturer1 Example="YAGEO PHYCOMP", Manufacturer1 Part Number=CC0805JRNPO9BN361, Tolerance=±5%, Voltage=50V, Author="CERN DEM HF", Component Type=Standard, CreateDate=30.05.2024, HelpURL=\\cern.ch\dfs\Applications\Altium\Datasheets\CC0805_NP0_YAGEO.pdf, LatestRevisionDate=30.05.2024, Manufacturer Part Number=CC0805_360PF_50V_5%_C0G, Mounted=Yes, Part Description="SMD Multilayer Chip Ceramic Capacitor", Part Number=CC0805_360PF_50V_5%_C0G, Pin Count=2, Sense=No, SMD=Yes, Socket=No, Status=None, TC=NP0
C130 C148: library part CC0805_4.7NF_50V_10%_X7R, "Non-polarised capacitor", Case=0805, Manufacturer=GENERIC, Manufacturer1 ComponentHeight=0.94mm, Manufacturer1 Example=PHYCOMP, Manufacturer1 Part Number=223858615632, Tolerance=±10%, Voltage=50V, Author="CERN DEM JLC", Component Type=Standard, CreateDate=03.12.2007, HelpURL=\\cern.ch\dfs\Applications\Altium\Datasheets\CC0805_X7R_PHYCOMP.pdf, LatestRevisionDate=03.12.2007, Manufacturer Part Number=CC0805_4.7NF_50V_10%_X7R, Mounted=Yes, Part Description="SMD Multilayer Chip Ceramic Capacitor", Part Number=CC0805_4.7NF_50V_10%_X7R, Pin Count=2, Sense=No, SMD=Yes, Socket=No, Status=Preferred, TC=X7R
C133: library part CC0402_10NF_25V_10%_X7R, "Non-polarised capacitor", Case=0402, Manufacturer=GENERIC, Manufacturer1 ComponentHeight=0.55mm, Manufacturer1 Example=TDK, Manufacturer1 Part Number=C1005X7R1E103K050, Tolerance=±10%, Voltage=25V, Author="CERN DEM JLC", Component Type=Standard, CreateDate=25.10.2012, HelpURL=\\cern.ch\dfs\Applications\Altium\Datasheets\CC0402_X7R_TDK_C.pdf, LatestRevisionDate=25.10.2012, Manufacturer Part Number=CC0402_10NF_25V_10%_X7R, Mounted=Yes, Part Description="SMD Multilayer Chip Ceramic Capacitor", Part Number=CC0402_10NF_25V_10%_X7R, Pin Count=2, Sense=No, SMD=Yes, Socket=No, Status=Preferred, TC=X7R
C150: library part CC0805_100PF_50V_5%_NP0, "Non-polarised capacitor", Case=0805, Manufacturer=GENERIC, Manufacturer1 ComponentHeight=1.35mm, Manufacturer1 Example=PHYCOMP, Manufacturer1 Part Number=223886115101, Tolerance=±5%, Voltage=50V, Author="CERN DEM JLC", Component Type=Standard, CreateDate=03.12.2007, HelpURL=\\cern.ch\dfs\Applications\Altium\Datasheets\CC0805_NP0_PHYCOMP.pdf, LatestRevisionDate=03.12.2007, Manufacturer Part Number=CC0805_100PF_50V_5%_NP0, Mounted=Yes, Part Description="SMD Multilayer Chip Ceramic Capacitor", Part Number=CC0805_100PF_50V_5%_NP0, Pin Count=2, Sense=No, SMD=Yes, Socket=No, Status=Preferred, TC=C0G/NP0
C153A C153B C153C C153D C154A C154B C154C C154D C155A C155B C155C C155D C156A C156B C156C C156D: library part CC0603_33PF_50V_5%_NP0, "Non-polarised capacitor", Case=0603, Manufacturer=GENERIC, Manufacturer1 ComponentHeight=0.87mm, Manufacturer1 Example=PHYCOMP, Manufacturer1 Part Number=223886715339, Tolerance=±5%, Voltage=50V, Author="CERN DEM JLC", Component Type=Standard, CreateDate=03.12.2007, HelpURL=\\cern.ch\dfs\Applications\Altium\Datasheets\CC0603_NP0_PHYCOMP.pdf, LatestRevisionDate=03.12.2007, Manufacturer Part Number=CC0603_33PF_50V_5%_NP0, Mounted=Yes, Part Description="SMD Multilayer Chip Ceramic Capacitor", Part Number=CC0603_33PF_50V_5%_NP0, Pin Count=2, Sense=No, SMD=Yes, Socket=No, Status=Preferred, TC=C0G/NP0
C163A C163B: library part CTE3528-21_330UF_2.5V_20%_LESR0015_KEMET_T520, "Polarised capacitor", Case=B, Manufacturer=KEMET, Manufacturer Part Number=T520B337M2R5ATE015, Tolerance=±20%, Voltage=2.5V, Author="CERN DEM JLC", Component Type=Standard, ComponentHeight=2.1mm, CreateDate=07.03.2012, HelpURL=\\cern.ch\dfs\Applications\Altium\Datasheets\CTE-LESR_KEMET_T520.pdf, LatestRevisionDate=01.09.2014, Mounted=Yes, Part Description="Low ESR 0R015 Tantalum Chip Capacitor", Part Number=CTE3528-21_330UF_2.5V_20%_LESR0015_KEMET_T520, Pin Count=2, Sense=No, SMD=Yes, Socket=No, Status=None
C192: library part CAE830-1020_560UF_10V_20%, "Polarised capacitor", Case=F, Manufacturer=PANASONIC, Manufacturer Part Number=EEEFH1A561L, Tolerance=±20%, Voltage=10V, Author="CERN DEM HF", Component Type=Standard, ComponentHeight=10.2mm, CreateDate=24.05.2024, HelpURL=\\cern.ch\dfs\Applications\Altium\Datasheets\CAE_PANASONIC_FH.pdf, LatestRevisionDate=24.05.2024, Mounted=Yes, Part Description="Aluminum Electrolytic SMT Capacitor", Part Number=CAE830-1020_560UF_10V_20%, Pin Count=2, Sense=No, SMD=Yes, Socket=No, Status="Not Recommended"
C200A C200B C214A C214B C221A C221B C226A C226B C229A C229B C232A C232B: library part CC0402_4.7UF_4V_20%_X6S_TDK_C1005X6S0G475M050BC, "Non-polarised capacitor", Case=0402, Manufacturer=TDK, Manufacturer Part Number=C1005X6S0G475M050BC, Tolerance=±20%, Voltage=4V, Author="CERN DEM BC", Component Type=Standard, ComponentHeight=0.65mm, CreateDate=2020-09-14, HelpURL="\\cern.ch\dfs\Applications\Altium\Datasheets\CC0402_X6S_TDK_C(up to 75V).pdf", LatestRevisionDate=2020-09-14, Mounted=Yes, Part Description="SMD Multilayer Chip Ceramic Capacitor (Commercial Grade)", Part Number=CC0402_4.7UF_4V_20%_X6S_TDK_C1005X6S0G475M050BC, Pin Count=2, Sense=No, SMD=Yes, Socket=No, Status=None, TC=X6S
C202A C202B: library part CC0805_18PF_50V_1%_C0G, "Non-polarised capacitor", Case=0805, Manufacturer=GENERIC, Manufacturer1 ComponentHeight=0.88mm, Manufacturer1 Example=KEMET, Manufacturer1 Part Number=C0805C180F5GACTU, Tolerance=±1%, Voltage=50V, Author="CERN DEM JLC", Component Type=Standard, CreateDate=27.01.2015, HelpURL="\\cern.ch\dfs\Applications\Altium\Datasheets\CC0805_C0G_KEMET_(Commercial Grade).pdf", LatestRevisionDate=27.01.2015, Manufacturer Part Number=CC0805_18PF_50V_1%_C0G, Mounted=Yes, Part Description="SMD Multilayer Chip Ceramic Capacitor", Part Number=CC0805_18PF_50V_1%_C0G, Pin Count=2, Sense=No, SMD=Yes, Socket=No, Status=None, TC=C0G/NP0
C304A C304B C304C C304D: library part CC0805_100NF_50V_1%_NP0, "Non-polarised capacitor", Case=0805, Manufacturer=GENERIC, Manufacturer1 ComponentHeight=1.35mm, Manufacturer1 Example="WALSIN TECHNOLOGY CORPORATION", Manufacturer1 Part Number=0805N103F500C, Tolerance=±1%, Voltage=50V, Author="CERN DEM HF", Component Type=Standard, CreateDate=28.08.2023, HelpURL=\\cern.ch\dfs\Applications\Altium\Datasheets\CC0805_WALSIN_0805.pdf, LatestRevisionDate=28.08.2023, Manufacturer Part Number=CC0805_100NF_50V_1%_NP0, Mounted=Yes, Part Description="SMD Multilayer Chip Ceramic Capacitor", Part Number=CC0805_100NF_50V_1%_NP0, Pin Count=2, Sense=No, SMD=Yes, Socket=No, Status="Not Recommended", TC=C0G/NP0
C305A C305B C305C C305D C306A C306B C306C C306D C309A C309B C309C C309D C310A C310B C310C C310D C319A C319B C320A C320B: library part CC0603_1UF_25V_10%_X7R, "Non-polarised capacitor", Case=0603, Manufacturer=GENERIC, Manufacturer1 ComponentHeight=0.9mm, Manufacturer1 Example=MURATA, Manufacturer1 Part Number=GRM188R71E105KA12D, Tolerance=±10%, Voltage=25V, Author="CERN DEM JLC", Component Type=Standard, CreateDate=18.01.2011, HelpURL=\\cern.ch\dfs\Applications\Altium\Datasheets\CC0603_X7R_MURATA.pdf, LatestRevisionDate=18.01.2011, Manufacturer Part Number=CC0603_1UF_25V_10%_X7R, Mounted=Yes, Part Description="SMD Multilayer Chip Ceramic Capacitor", Part Number=CC0603_1UF_25V_10%_X7R, Pin Count=2, Sense=No, SMD=Yes, Socket=No, Status=None, TC=X7R
D1A D1B D4A D4B D5: "Fivefold ESD Protection Diode Arrays", Case=SOT363, Manufacturer=NEXPERIA, Power=200W, Voltage=3.3V, Author="CERN DEM WB", Bonding=No, Component Type=Standard, ComponentHeight=1.1mm, CreateDate=05/07/2021, Device=PESD3V3L5UY, HelpURL=\\cern.ch\dfs\Applications\Altium\Datasheets\PESD3V3L5UY.pdf, LatestRevisionDate=05/07/2021, Manufacturer Part Number=PESD3V3L5UY, Mounted=Yes, PackageDescription="SOT363, SC-88, 0.65mm Pitch; 6 Pin, 1.25mm W X 2.00mm L X 1.10mm H body, IPC Medium Density", Part Description="Fivefold ESD Protection Diode Arrays (30kV)", Part Number=PESD3V3L5UY, Pin Count=6, PressFit=No, Sense=No, SMD=Yes, Socket=No
D2 D3: "Diode Zener Anode Pin 1 Cathode Pin 3 (Pas de pin 2)", Case=SOT23-3, Manufacturer="FAIRCHILD SEMICONDUCTOR", Power=350mW, Voltage=3V3, Author="CERN DEM JLC", Bonding=No, Component Type=Standard, ComponentHeight=1.3mm, CreateDate=15.06.2011, Device=BZX84C3V3, HelpURL=\\cern.ch\dfs\Applications\Altium\Datasheets\BZX84C3V3.pdf, LatestRevisionDate=15.06.2011, Manufacturer Part Number=BZX84C3V3, Mounted=Yes, PackageDescription="SOT, 0.95mm Pitch; 3 Pin, 1.30mm W X 2.90mm L X 1.30mm H body, IPC Medium Density", Part Description="Zener Diode", Part Number=BZX84C3V3, Pin Count=3, PressFit=No, Sense=No, SMD=Yes, Socket=No
D6: "Diode", Case=SOD-323F, Manufacturer="FAIRCHILD SEMICONDUCTOR", Power=150mA, Voltage=75V, Author="CERN DEM JLC", Bonding=No, Component Type=Standard, ComponentHeight=1mm, CreateDate=12.05.2011, Device=1N4148WS, HelpURL=\\cern.ch\dfs\Applications\Altium\Datasheets\1N4148WS.pdf, LatestRevisionDate=12.05.2011, Manufacturer Part Number=1N4148WS, Mounted=Yes, PackageDescription="SODFL Diode (SOD323F); 1.70mm W X 1.25mm L X 1.00mm H body, IPC Medium Density", Part Description="Small Signal Diodes", Part Number=1N4148WS, Pin Count=2, PressFit=No, Sense=No, SMD=Yes, Socket=No
D8A D8B D8C D8D D9A D9B D9C D9D D10A D10B D10C D10D D11A D11B D11C D11D: library part D_BAT1504WH6327XTSA1, "Serial Schottky Diode", Case=SOT323, Manufacturer=Infineon, Power=110mA, Voltage=4V, Author=GK, Bonding=No, Component Type=Standard, ComponentHeight=1.10mm, CreateDate=05.12.2013, Device=BAT1504WH6327XTSA1, HelpURL=\\cern.ch\dfs\Applications\Altium\Datasheets\BAS70-04W.pdf, LatestRevisionDate=05.12.2013, Manufacturer Part Number=BAT1504WH6327XTSA1, Mounted=Yes, PackageDescription="SOT323, 0.65mm Pitch; 3 Pin, 1.25mm W X 2.00mm L X 1.10mm H body, IPC Medium Density", Part Description="Dual Series General-Purpose Schottky Diodes", Part Number=BAT1504WH6327XTSA1, Pin Count=3, PressFit=No, Sense=No, SMD=Yes, Socket=No
DA1A DA1B IC1A IC1B: library part OA_ADA4522-4ARUZ, "55 V, EMI Enhanced, Zero Drift, Ultralow Noise, Rail-to-Rail Output Operational / Amplifiers", Case=MSOP14, Manufacturer="ANALOG DEVICES", Author=GK, Bonding=No, Component Type=Standard, ComponentHeight=1.2mm, CreateDate=07.01.2021, Device=ADA4522-4ARUZ, HelpURL=\\cern.ch\dfs\Applications\Altium\Datasheets\ADA4000-4ARUZ.pdf, LatestRevisionDate=31.03.2022, Manufacturer Part Number=ADA4522-4ARUZ, Mounted=Yes, PackageDescription="SOP, 0.65mm Pitch; 14 Pin, 4.40mm W X 5.00mm L X 1.20mm H body, IPC Medium Density", Part Description="55 V, EMI Enhanced, Zero Drift, Ultralow Noise, Rail-to-Rail Output Operational", Part Number=ADA4522-4ARUZ, Pin Count=14, PressFit=No, Sense=No, SMD=Yes, Socket=No
DA2A DA2B: "Single-Supply, High Speed PECL/LVPECL Comparators", Case=MSOP8, Manufacturer="ANALOG DEVICES", Author="CERN DEM HF", Bonding=No, Component Type=Standard, ComponentHeight=1.1mm, CreateDate=06.05.2024, Device=ADCMP553BRM, HelpURL=\\cern.ch\dfs\Applications\Altium\Datasheets\ADCMP553.pdf, LatestRevisionDate=06.05.2024, Manufacturer Part Number=ADCMP553BRM, Mounted=Yes, PackageDescription="SOP, 0.65mm Pitch; 8 Pin, 3.00mm W X 3.00mm L X 1.10mm H body, IPC Medium Density", Part Description="Single-Supply, High Speed, PECL/LVPECL Comparators", Part Number=ADCMP553BRM, Pin Count=8, PressFit=No, Sense=No, SMD=Yes, Socket=No
DA6A DA6B DA6C DA6D DA15A DA15B DA15C DA15D: "Dual Low Noise, 1GHz FastFEET Operational Amplifier", Case=QFN16, Manufacturer="ANALOG DEVICES", Manufacturer Part Number=ADA4817-2ACP, Author="CERN DEM BC", Bonding=No, Component Type=Standard, ComponentHeight=0.8mm, CreateDate=25.03.2020, Device=ADA4817-2ACPZ, HelpURL=\\cern.ch\dfs\Applications\Altium\Datasheets\ADA4817-2ACPZ.pdf, LatestRevisionDate=31.03.2022, Mounted=Yes, PackageDescription="QFN, 0.65mm Pitch, Square; 16 Pin, 4.00mm L X 4.00mm W X 0.80mm H body (w/Thermal Tab 2.40 X 2.40mm), IPC Medium Density", Part Description="Dual Low Noise, 1GHz FastFEET Operational Amplifier", Part Number=ADA4817-2ACPZ, Pin Count=17, PressFit=No, Sense=No, SMD=Yes, Socket=No
DA7: "60V, 4A Synchronous Step-Down Regulator with Rail-to-Rail Programmable Output", Case=SOP28, Manufacturer="LINEAR TECHNOLOGY", Author="CERN DEM HF", Bonding=No, Component Type=Standard, ComponentHeight=1.2mm, CreateDate=05.06.2024, Device=LTC3649EFE, HelpURL=\\cern.ch\dfs\Applications\Altium\Datasheets\LTC3649.pdf, LatestRevisionDate=05.06.2024, Manufacturer Part Number=LTC3649EFE, Mounted=Yes, PackageDescription="SOP, 0.65mm pitch; 28 pin, 4.50mm W X 9.70mm L (thermal tab 4.75 X 2.74mm), IPC Medium Density", Part Description="60V, 4A Synchronous Step-Down Regulator with Rail-to-Rail Programmable Output", Part Number=LTC3649EFE, Pin Count=29, PressFit=No, Sense=No, SMD=Yes, Socket=No
DA8: "60V, 4A Synchronous  Step-Down Regulator for Inverting Outputs", Case=SOP28, Manufacturer="LINEAR TECHNOLOGY", Author="CERN DEM HF", Bonding=No, Component Type=Standard, ComponentHeight=1.2mm, CreateDate=06.06.2024, Device=LTC7149EFE, HelpURL=\\cern.ch\dfs\Applications\Altium\Datasheets\LTC7149.pdf, LatestRevisionDate=06.06.2024, Manufacturer Part Number=LTC7149EFE, Mounted=Yes, PackageDescription="SOP, 0.65mm pitch; 28 pin, 4.50mm W X 9.70mm L (thermal tab 4.75 X 2.74mm), IPC Medium Density", Part Description="60V, 4A Synchronous Step-Down Regulator for Inverting Outputs", Part Number=LTC7149EFE, Pin Count=29, PressFit=No, Sense=No, SMD=Yes, Socket=No
DA17A DA17B: "Precision Micropower, Low Dropout Voltage Reference", Case=SOIC8, Manufacturer="ANALOG DEVICES", Author="CERN DEM HF", Bonding=No, Component Type=Standard, ComponentHeight=1.75mm, CreateDate=17.05.2024, Device=REF191ES, HelpURL=\\cern.ch\dfs\Applications\Altium\Datasheets\REF19x_Series.pdf, LatestRevisionDate=17.05.2024, Manufacturer Part Number=REF191ES, Mounted=Yes, PackageDescription="SOIC 8, Pitch 1.27mm, Body 4x5mm, IPC Medium Density", Part Description="2.048V Precision Micropower, Low Dropout Voltage Reference, 5ppm/°C, −40°C to +85°C", Part Number=REF191ES, Pin Count=8, PressFit=No, Sense=No, SMD=Yes, Socket=No
DA21: "Precision Dual Supply Monitors with One Pin-Selectable Threshold and One Adjustable Input", Case=SOT23-8, Manufacturer="LINEAR TECHNOLOGY", Author="CERN DEM HF", Bonding=No, Component Type=Standard, ComponentHeight=1mm, CreateDate=05.06.2024, Device=LTC2906ITS8, HelpURL=\\cern.ch\dfs\Applications\Altium\Datasheets\LTC2906.pdf, LatestRevisionDate=05.06.2024, Manufacturer Part Number=LTC2906ITS8, Mounted=Yes, PackageDescription="SOT, 0.65mm Pitch; 8 Pin, 1.625mm W X 2.90mm L X 1.00mm H Body, IPC Medium Density", Part Description="Precision Dual Supply Monitors with One Pin-Selectable Threshold and One Adjustable Input", Part Number=LTC2906ITS8, Pin Count=8, PressFit=No, Sense=No, SMD=Yes, Socket=No
DA22A DA22B: "16-Bit, Quad-Channel, Uultra-Low Glitch, Voltage Output Digital-to-Analog Converter", Case=TSSOP16, Manufacturer="TEXAS INSTRUMENTS", Author="CERN DEM HF", Bonding=No, Component Type=Standard, ComponentHeight=1.1mm, CreateDate=07.05.2024, Device=DAC8554IPW, HelpURL=\\cern.ch\dfs\Applications\Altium\Datasheets\DAC8554.pdf, LatestRevisionDate=07.05.2024, Manufacturer Part Number=DAC8554IPW, Mounted=Yes, PackageDescription="SOP, 0.65mm Pitch; 16 Pin, 4.40mm W X 5.00mm L X 1.10mm H body, IPC Medium Density", Part Description="16-Bit, Quad-Channel, Uultra-Low Glitch, Voltage Output Digital-to-Analog Converter", Part Number=DAC8554IPW, Pin Count=16, PressFit=No, Sense=No, SMD=Yes, Socket=No
DA24A DA24B: "Wideband, Fixed Gain, Video Buffer Amplifier With Disable", Case=SOT23-6, Manufacturer="TEXAS INSTRUMENTS", Author="CERN DEM HF", Bonding=No, Component Type=Standard, ComponentHeight=1.45mm, CreateDate=17.05.2024, Device=TLV3501AIDBV, HelpURL=\\cern.ch\dfs\Applications\Altium\Datasheets\TLV3501.pdf, LatestRevisionDate=17.05.2024, Manufacturer Part Number=TLV3501AIDBV, Mounted=Yes, PackageDescription="SOT, 0.95mm Pitch; 6 Pin, 1.60mm W X 2.90mm L X 1.45mm H body, IPC Medium Density", Part Description="4.5-ns, Rail-to-Rail, High-Speed Comparator", Part Number=TLV3501AIDBV, Pin Count=6, PressFit=No, Sense=No, SMD=Yes, Socket=No
DA26A DA26B: "3-Terminal Regulator 1=IN 2=GND 3=OUT 4=GND", Case=SOT223, Manufacturer="TEXAS INSTRUMENTS", Manufacturer Part Number=LM3940IMP-3.3, Author="CERN DEM JLC", Bonding=No, Component Type=Standard, ComponentHeight=1.8mm, CreateDate=28.03.2011, Device=LM3940IMP-3.3/NOPB, HelpURL=\\cern.ch\dfs\Applications\Altium\Datasheets\LM3940IMP-3.3-NOPB.pdf, LatestRevisionDate=01.06.2022, Mounted=Yes, PackageDescription="SOT223, 2.30mm Pitch; 4 Pin, 3.70mm W X 6.70mm L X 1.80mm H body, IPC Medium Density", Part Description="1A Low Dropout Regulator for 5V to 3.3V Conversion", Part Number=LM3940IMP-3.3/NOPB, Pin Count=4, PressFit=No, Sense=No, SMD=Yes, Socket=No
DA27: "±0.5°C Accurate, 16-Bit Digital SPI Temperature Sensor", Case=SOIC8, Manufacturer="ANALOG DEVICES", Author="CERN DEM HF", Bonding=No, Component Type=Standard, ComponentHeight=1.75mm, CreateDate=24.05.2024, Device=ADT7311WTR, HelpURL=\\cern.ch\dfs\Applications\Altium\Datasheets\ADT7311WTR.pdf, LatestRevisionDate=24.05.2024, Manufacturer Part Number=ADT7311WTR, Mounted=Yes, PackageDescription="SOIC 8, Pitch 1.27mm - Body 4x5mm, IPC Medium Density", Part Description="±0.5°C Accurate, 16-Bit Digital SPI Temperature Sensor", Part Number=ADT7311WTR, Pin Count=8, PressFit=No, Sense=No, SMD=Yes, Socket=No
DD1A DD1B: "5V PECL to TTL Translator", Case=TSSOP8, Manufacturer="TEXAS INSTRUMENTS", Author="CERN DEM HF", Bonding=No, Component Type=Standard, ComponentHeight=1.1mm, CreateDate=17.05.2024, Device=SN65EPT23DGK, HelpURL=\\cern.ch\dfs\Applications\Altium\Datasheets\SN65EPT23.pdf, LatestRevisionDate=17.05.2024, Manufacturer Part Number=SN65EPT23DGK, Mounted=Yes, PackageDescription="SOP, 0.65mm Pitch; 8 Pin, 3.00mm W X 3.00mm L X 1.10mm H body, IPC Medium Density", Part Description="3.3V ECL Differential LVPECL/LVDS to LVTTL/LVCMOS Translator", Part Number=SN65EPT23DGK, Pin Count=8, PressFit=No, Sense=No, SMD=Yes, Socket=No
DD2A DD2B: "3V LVDS Single CMOS Differential Line Receiver", Case=SOT23-5, Manufacturer="TEXAS INSTRUMENTS", Author="CERN DEM HF", Bonding=No, Component Type=Standard, ComponentHeight=1.45mm, CreateDate=08.05.2024, Device=DS90LT012ATMF, HelpURL=\\cern.ch\dfs\Applications\Altium\Datasheets\DS90LT012ATMF.pdf, LatestRevisionDate=08.05.2024, Manufacturer Part Number=DS90LT012ATMF, Mounted=Yes, PackageDescription="SOT, 0.95mm Pitch; 5 Pin, 1.60mm W X 2.90mm L X 1.45mm H body, IPC Medium Density", Part Description="3V LVDS Single CMOS Differential Line Receiver", Part Number=DS90LT012ATMF, Pin Count=5, PressFit=No, Sense=No, SMD=Yes, Socket=No
DD3: "5/10 Outputs Clock Generator/Jitter Cleaner with Integrated Dual VCO", Case=QFN48, Manufacturer="TEXAS INSTRUMENTS", Manufacturer Part Number=CDCE62005RGZ, Author="CERN DEM JLC", Bonding=No, Component Type=Standard, ComponentHeight=1mm, CreateDate=21.11.2011, Device=CDCE62005RGZT, HelpURL=\\cern.ch\dfs\Applications\Altium\Datasheets\CDCE62005RGZT.pdf, LatestRevisionDate=10.06.2022, Mounted=Yes, PackageDescription="QFN, 0.50mm Pitch, Square; 48 Pin, 7.00mm L X 7.00mm W X 1.00mm H body (w/Thermal Tab 5.70 X 5.70mm), IPC Medium Density", Part Description="5/10 Outputs Clock Generator/Jitter Cleaner with Integrated Dual VCO", Part Number=CDCE62005RGZT, Pin Count=49, PressFit=No, Sense=No, SMD=Yes, Socket=No
DD5: "8/16-bit XMEGA A3BU 32MHz Microcontroller With 256KBytes of in-System Self-Programmable Flash", Case=QFP64, Manufacturer="MICROCHIP TECHNOLOGY", Author="CERN DEM HF", Bonding=No, Component Type=Standard, ComponentHeight=1.2mm, CreateDate=24.05.2024, Device=ATXMEGA128A3U-AU, HelpURL=\\cern.ch\dfs\Applications\Altium\Datasheets\ATXMEGA128A3U-AU.pdf, LatestRevisionDate=24.05.2024, Manufacturer Part Number=ATXMEGA128A3U-AU, Mounted=Yes, PackageDescription="QFP, 0.80mm Pitch, Square; 64 Pin, 14.00mm L X 14.00mm W X 1.20mm H body, IPC Medium Density", Part Description="8/16-bit XMEGA A3U 32MHz Microcontroller with 128KBytes of in-System Self-Programmable Flash", Part Number=ATXMEGA128A3U-AU, Pin Count=64, PressFit=No, Sense=No, SMD=Yes, Socket=No
DD10: "CMOS Timer", Case=SOIC8, Manufacturer="NATIONAL SEMICONDUCTOR", Manufacturer Part Number=LMC555CM, Author="CERN DEM JLC", Bonding=No, Component Type=Standard, ComponentHeight=1.75mm, CreateDate=12.04.2010, Device=LMC555CM/NOPB, HelpURL=\\cern.ch\dfs\Applications\Altium\Datasheets\LMC555C-NOPB.pdf, LatestRevisionDate=01.06.2022, Mounted=Yes, PackageDescription="SOIC 8, Pitch 1.27mm, Body 4x5mm, IPC Medium Density", Part Description="CMOS Timer", Part Number=LMC555CM/NOPB, Pin Count=8, PressFit=No, Sense=No, SMD=Yes, Socket=No